# EAGLE board eins (EAGLE 7.6.0)
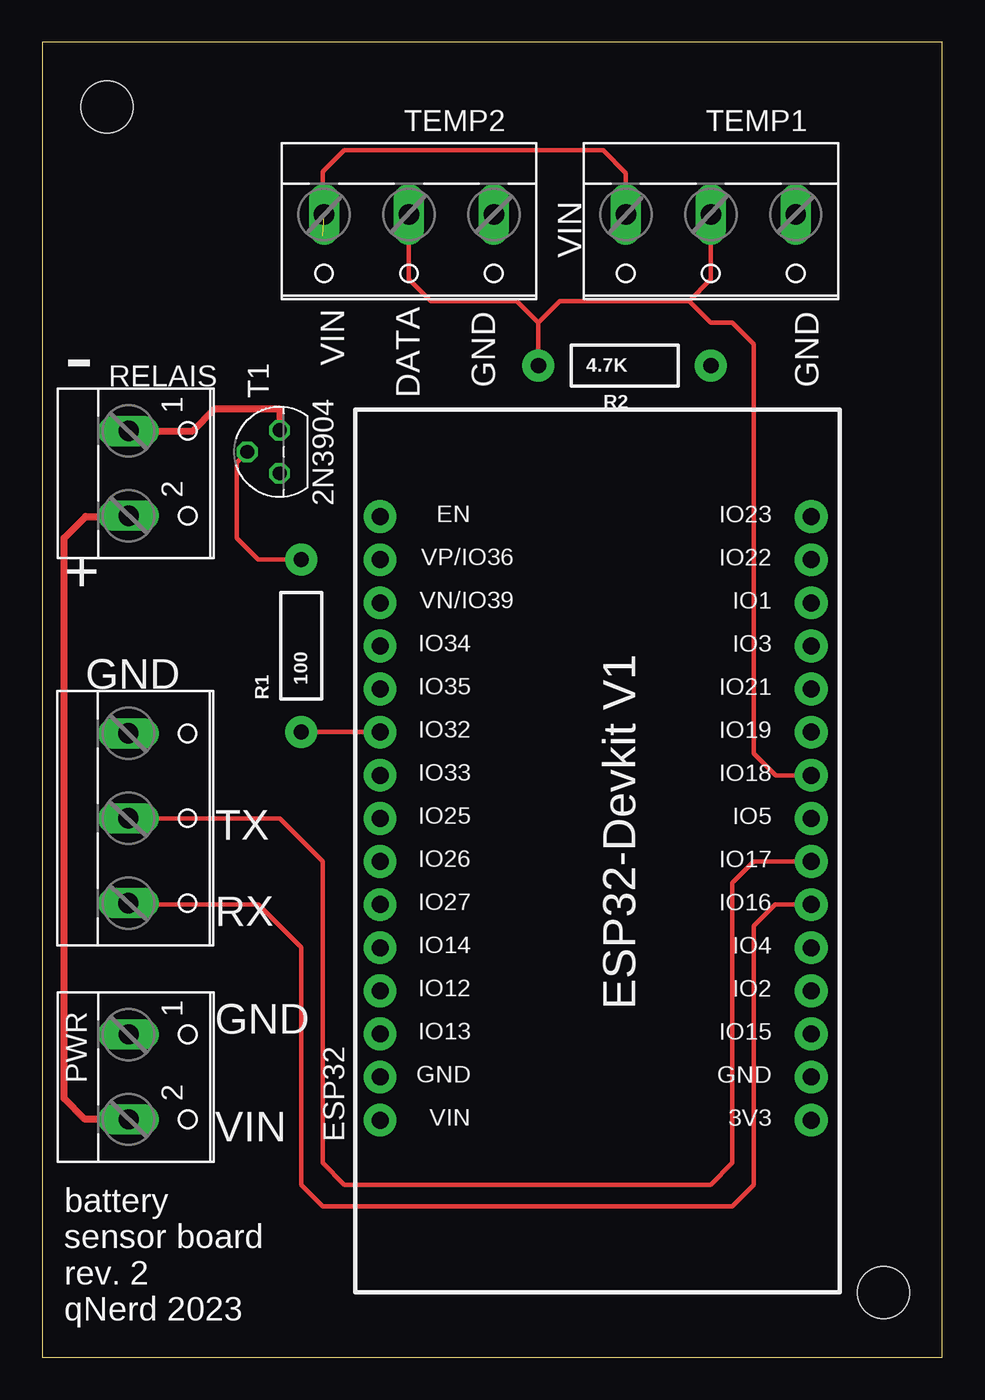
[diagram p0: board, top side]
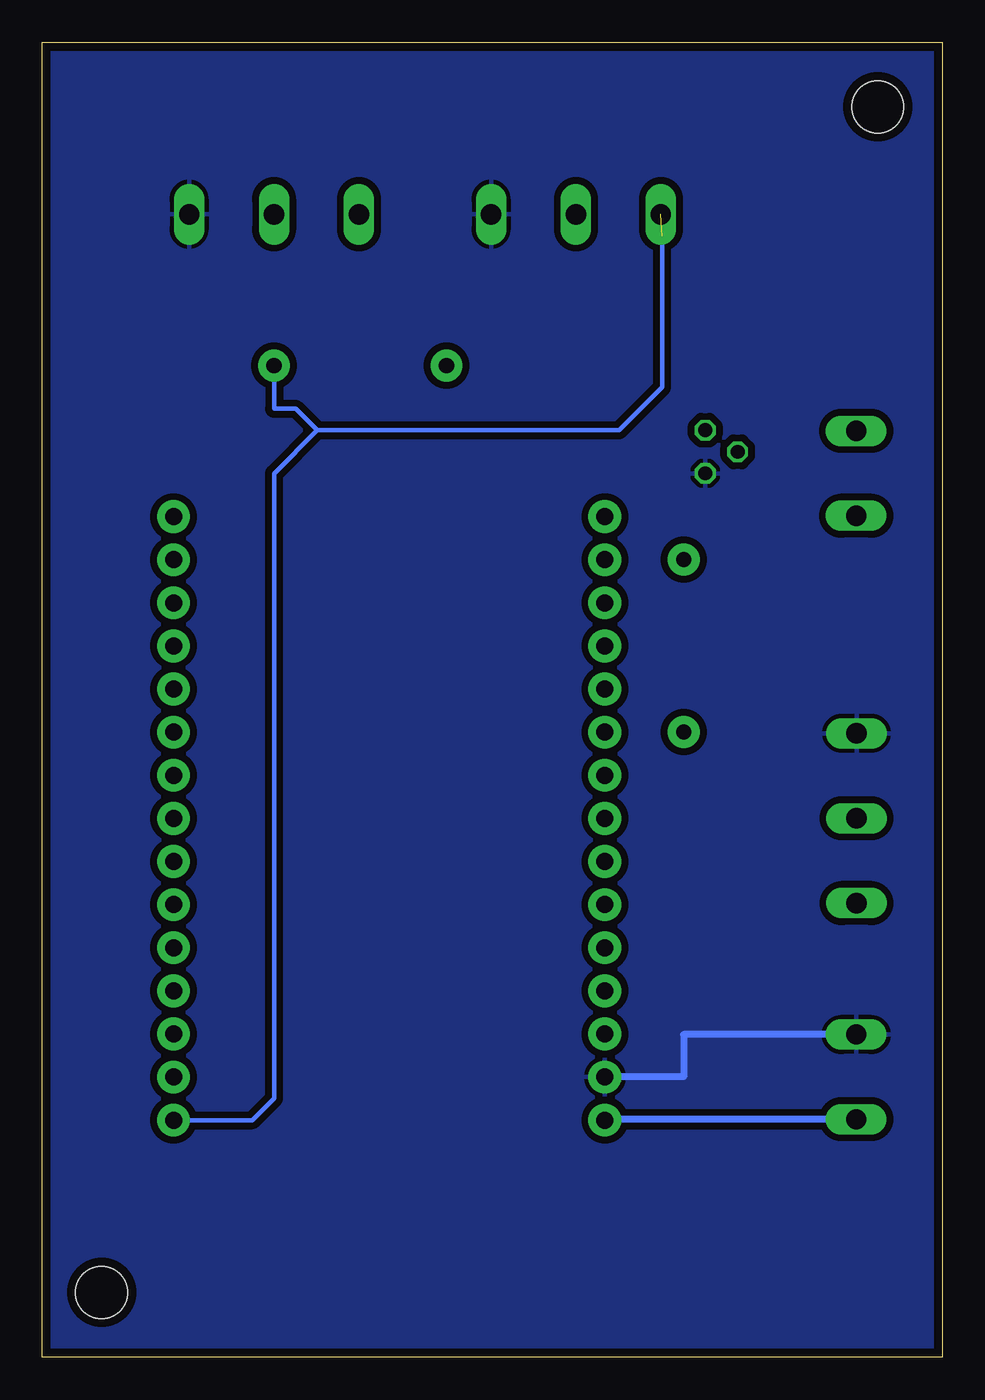
[diagram p1: board, bottom side, seen from below]

Size 53.01 x 77.46 mm. Coordinates in mm from the lower left corner, seen from the top.
Outline: 0,0 53.01,0 53.01,77.46 0,77.46 0,0
Copper layers (1*16): Top 0.035mm / dielectric 1.6mm / Bottom 0.035mm
Design rules "Elecrow_2-layer_PCB_eagle_rule": minimum track width 6mil, minimum drill 12mil, track to track 6mil, track to pad 6mil, pad to pad 6mil, via to via 8mil, smd to smd 0mil, copper to edge 20mil, drill to drill 10mil, minimum pad ring 6mil, minimum via ring 6mil, stop-mask expansion 0mil, vias tented up to drill 100mil, thermal gap 10mil
Holes 3.05 mm at 3.81,73.66 49.53,3.81

## Footprints (pad centres in the part's own frame; a part is rotated, then mirrored left to right if it is on the bottom)
ESP32-DEVKITV1 = drill 1 pad 1.93: 3V3 -16.52,-12.27; D1 13.96,-12.27; D2 -8.9,-12.27; D3 11.42,-12.27; D4 -6.36,-12.27; D5 1.26,-12.27; D12 -8.9,13.135; D13 -11.44,13.135; D14 -6.36,13.135; D15 -11.44,-12.27; D16 -3.82,-12.27; D17 -1.28,-12.27; D18 3.8,-12.27; D19 6.34,-12.27; D21 8.88,-12.27; D22 16.5,-12.27; D23 19.04,-12.27; D25 1.26,13.135; D26 -1.28,13.135; D27 -3.82,13.135; D32 6.34,13.135; D33 3.8,13.135; D34 11.42,13.135; D35 8.88,13.135; D36 16.5,13.135; D39 13.96,13.135; EN 19.04,13.135; GND@1 -13.98,13.135; GND@2 -13.98,-12.27; VIN -16.52,13.135
W237-102 = drill 1.194 long: 1 -2.5,-1.27; 2 2.5,-1.27
AXIAL-0.4 = drill 0.9 pad 1.88: P$1 -5.08,0; P$2 5.08,0
TO92 = drill 0.813 octagon: 1 1.27,0; 2 0,1.905; 3 -1.27,0
W237-103 = drill 1.194 long: 1 -5,-1.29; 2 0,-1.29; 3 5,-1.29

## Placement (x,y rotation side)
ESP32  ESP32DEVKITV1  [ESP32-DEVKITV1]  33.02,30.48 90 top
PWR  5V  [W237-102]  6.35,16.51 270 top
R1  100  [AXIAL-0.4]  15.24,41.91 90 top
R2  4.7K  [AXIAL-0.4]  34.29,58.42 0 top
RELAIS  [W237-102]  6.35,52.07 270 top
T1  2N3904  [TO92]  13.97,53.34 90 top
TEMP1  [W237-103]  39.37,66.04 180 top
TEMP2  [W237-103]  21.59,66.04 180 top
URAT  URAT  [W237-103]  6.35,31.75 270 top

## Library data of the parts
ESP32 = ESP32-DEVKITV1
PWR RELAIS = con-wago-500; MPN: 237-102; OC_FARNELL: unknown; OC_NEWARK: 70K9898
R1 R2 = SparkFun-Passives
T1 = transistor
TEMP1 TEMP2 URAT = con-wago-500; MPN: 237-103; OC_FARNELL: unknown; OC_NEWARK: 18M7116

## Nets
GND: ESP32.GND@1 PWR.1 T1.3 TEMP1.1 TEMP2.1 URAT.1
N$1: ESP32.D17 URAT.2
N$2: ESP32.VIN PWR.2 RELAIS.2
N$3: R1.P$2 T1.2
N$4: RELAIS.1 T1.1
N$5: ESP32.D32 R1.P$1
N$7: ESP32.3V3 R2.P$2 TEMP1.3 TEMP2.3
N$8: ESP32.D18 R2.P$1 TEMP1.2 TEMP2.2
N$9: ESP32.D16 URAT.3

## Tracks (layer width: path | path; a pad name or v marks a point on that pad's centre or on a via)
GND
  Bottom 0.406: PWR.1 15.24,19.01 15.24,16.51 ESP32.GND@1
  pour Bottom (isolate 0.406): 0,77.47 0,0 53.34,0 53.34,77.47
N$1
  Top 0.254: ESP32.D17 41.9,29.2 40.64,27.94 40.64,11.43 39.37,10.16 17.78,10.16 16.51,11.43 16.51,29.21 13.97,31.75 URAT.2
N$2
  Top 0.406: PWR.2 2.5,14.01 1.27,15.24 1.27,48.26 2.54,49.53 5.04,49.53 RELAIS.2
  Bottom 0.406: PWR.2 19.88,14.01 ESP32.VIN
N$3
  Top 0.254: R1.P$2 12.7,46.99 11.43,48.26 11.43,52.7 T1.2
N$4
  Top 0.406: RELAIS.1 8.85,54.57 10.16,55.88 13.97,55.88 T1.1
N$5
  Top 0.254: ESP32.D32 R1.P$1
N$7  (1 unrouted)
  Top 0.254: TEMP1.3 34.37,69.77 33.02,71.12 17.78,71.12 16.51,69.85 16.51,67.41 TEMP2.3
  Bottom 0.254: ESP32.3V3 40.65,13.96 39.37,15.24 39.37,52.07 36.83,54.61 | 36.83,54.61 19.05,54.61 16.51,57.15 16.51,66.04 | R2.P$2 39.37,55.88 38.1,55.88 36.83,54.61
N$8
  Top 0.254: 29.21,60.96 27.94,62.23 22.86,62.23 21.59,63.5 TEMP2.2 | 29.21,60.96 30.48,62.23 38.1,62.23 | 38.1,62.23 39.37,63.5 TEMP1.2 | R2.P$1 29.21,60.96 | ESP32.D18 43.19,34.28 41.91,35.56 41.91,59.69 40.64,60.96 39.37,60.96 38.1,62.23
N$9
  Top 0.254: ESP32.D16 43.17,26.66 41.91,25.4 41.91,10.16 40.64,8.89 16.51,8.89 15.24,10.16 15.24,24.13 12.7,26.67 5.14,26.67 URAT.3

## Text on the board
tPlace: VIN | VIN | - | DATA | GND | GND | + | GND | TX | RX | GND | VIN
tNames: battery / sensor board / rev. 2 / qNerd 2023